# Altium PCB PCB_B Register_2021-10-06.pcbdoc
Units mm, origin at the board's own origin, x right, y up, seen from the top; angles counter-clockwise.
Board outline 124.59 x 83.95 mm, 2 copper layers (Top Layer, Bottom Layer); 29 components, 33 nets, 118 pads, 17 vias.
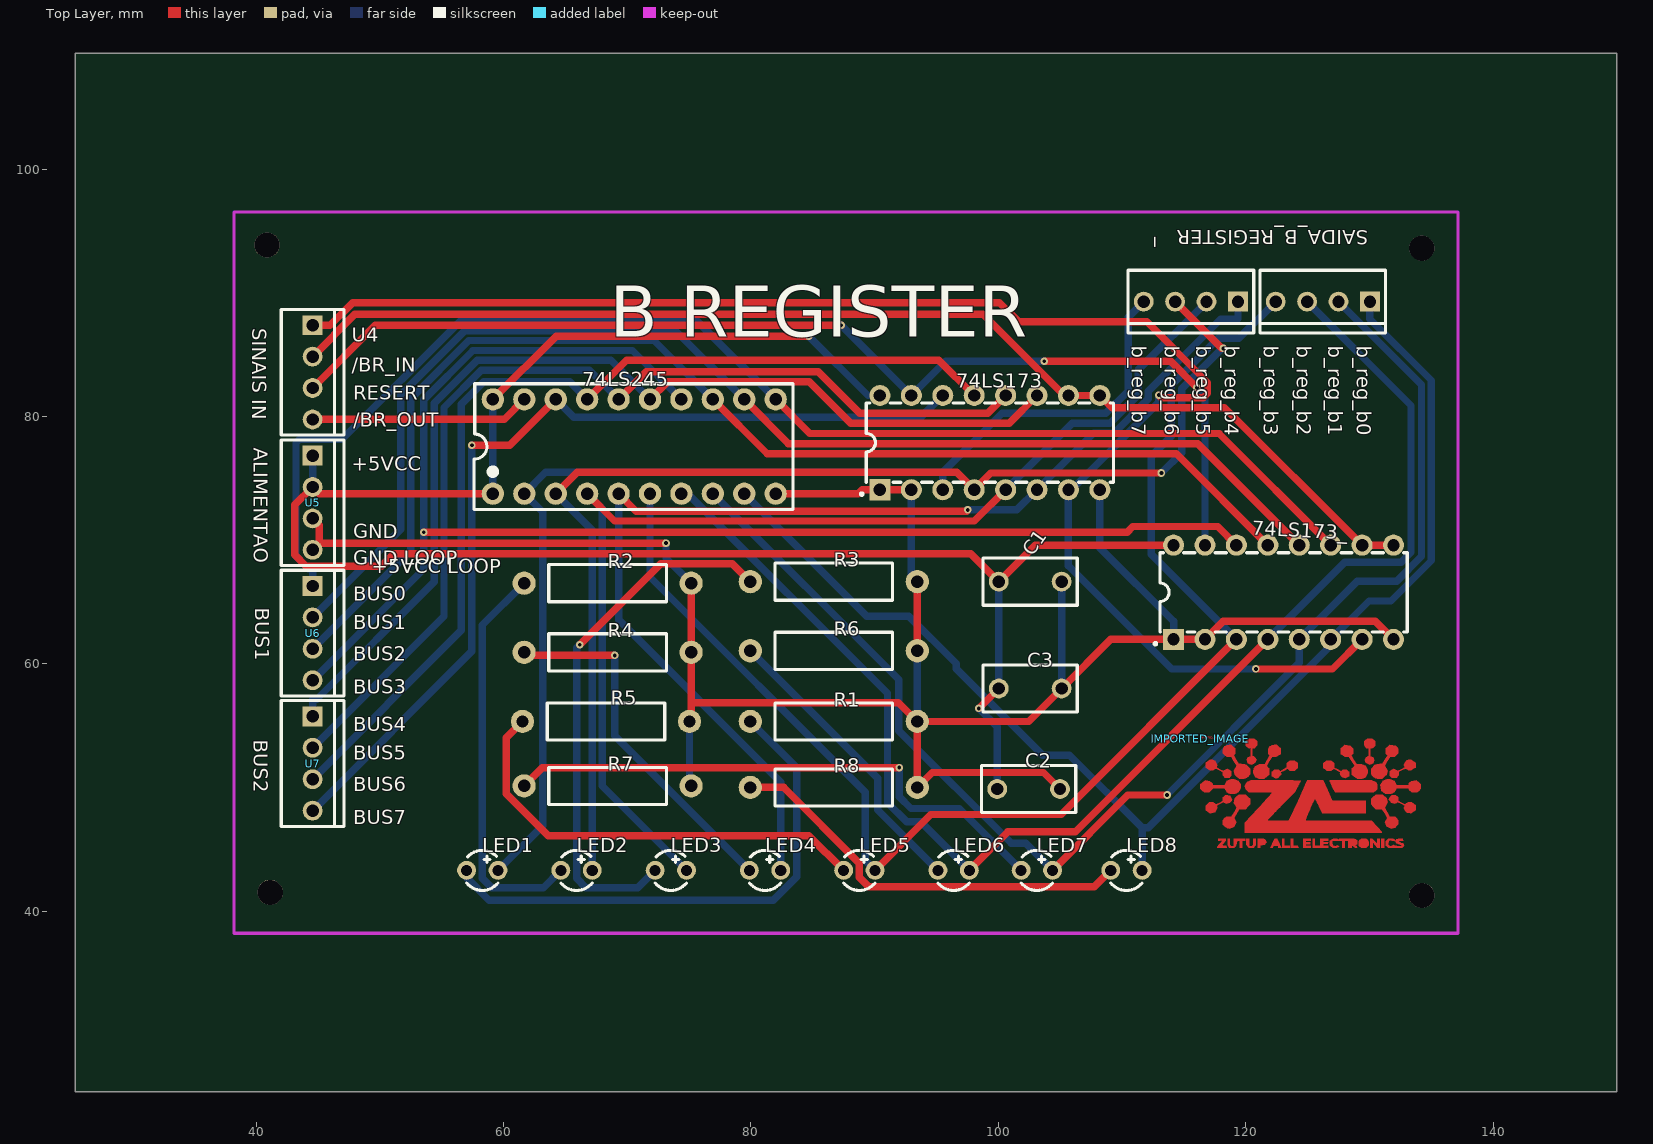
[diagram p0: Top Layer view]
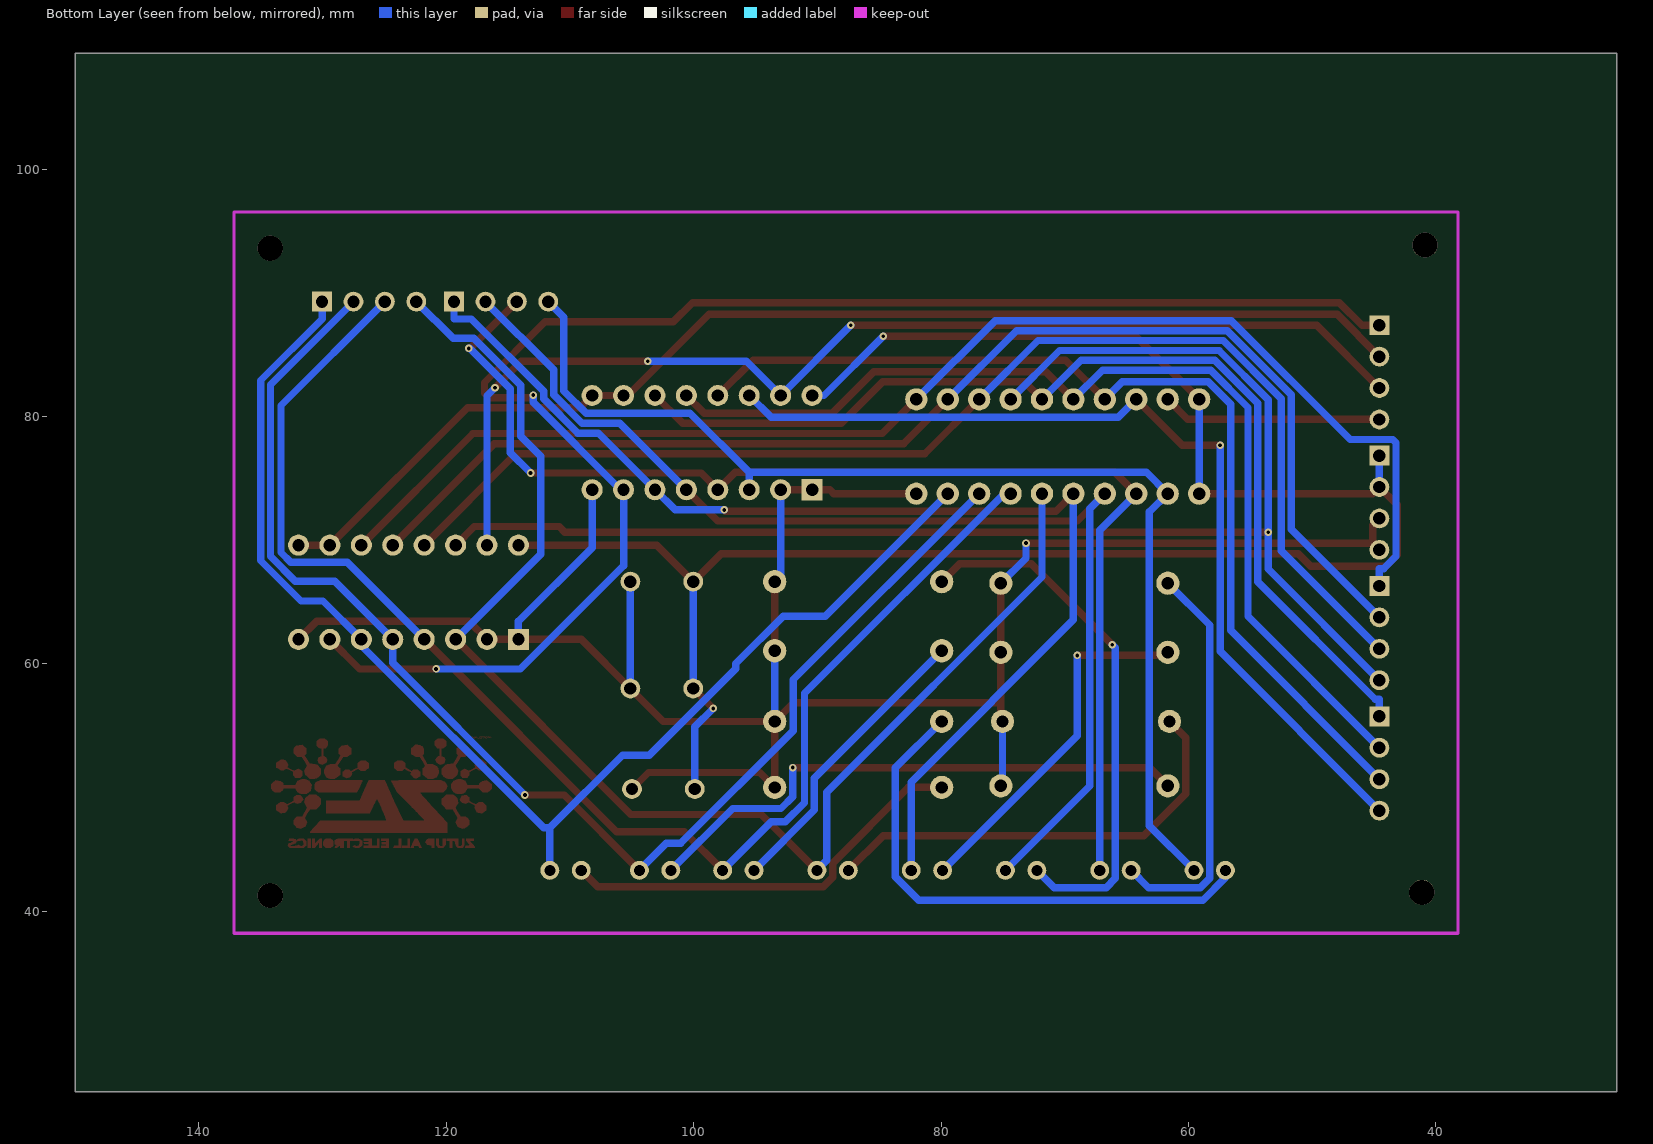
[diagram p1: Bottom Layer view, seen from below]

## Layer stack, top to bottom
Top Layer: signal copper (thickness not stored)
Dielectric: dielectric 0.32, FR-4, Dk 4.8
Bottom Layer: signal copper (thickness not stored)

## Board outline
149.987,25.4 25.4,25.4 25.4,109.347 149.987,109.347

## Components (designator, comment, footprint, x,y, rotation, side; value= is the part's Value field where it differs from the comment)
74LS173 "SN74LS173AN" PDIP-16_L19.7-W6.6-P2.54-LS7.6-BL 99.326,77.884 r0 top
74LS173_ "SN74LS173AN" PDIP-16_L19.7-W6.6-P2.54-LS7.6-BL 123.063,65.786 r0 top
74LS245 "SN74LS245N" DIP-20_L25.5-W10.0-P2.54-LS7.6-BL 70.578,77.567 r0 top
_ "ACC_OUT2" HDR-TH_4P-P2.54-D1.0 115.57,89.281 r180 top
C1 "100nF 63V poli7" CAP-TH_L7.6-W3.8-P5.08-D0.51 102.582,66.645 r0 top
C2 "100nF 63V poli" CAP-TH_L7.6-W3.8-P5.08-D0.51 102.455,49.881 r0 top
C3 "100nF 63V poli" CAP-TH_L7.6-W3.8-P5.08-D0.51 102.582,58.009 r0 top
IMPORTED_IMAGE "IMPORTED_IMAGE" IMPORTED_IMAGE 116.327,53.963 r0 top
LED1 "VERDE" LED-TH_BD3.0-P2.54-RD-GREEN 58.293,43.307 r0 top
LED2 "VERDE" LED-TH_BD3.0-P2.54-RD-GREEN 65.913,43.307 r0 top
LED3 "VERDE" LED-TH_BD3.0-P2.54-RD-GREEN 73.533,43.307 r0 top
LED4 "VERDE" LED-TH_BD3.0-P2.54-RD-GREEN 81.153,43.307 r0 top
LED5 "VERDE" LED-TH_BD3.0-P2.54-RD-GREEN 88.773,43.307 r0 top
LED6 "VERDE" LED-TH_BD3.0-P2.54-RD-GREEN 96.393,43.307 r0 top
LED7 "VERDE" LED-TH_BD3.0-P2.54-RD-GREEN 103.124,43.307 r0 top
LED8 "VERDE" LED-TH_BD3.0-P2.54-RD-GREEN 110.363,43.307 r0 top
R1 "470" RES-TH_BD3.0-L9.5-P13.50-D0.6 86.707,55.342 r0 top
R2 "470" RES-TH_BD3.0-L9.5-P13.50-D0.6 68.419,66.518 r0 top
R3 "470" RES-TH_BD3.0-L9.5-P13.50-D0.6 86.707,66.645 r0 top
R4 "470" RES-TH_BD3.0-L9.5-P13.50-D0.6 68.419,60.93 r0 top
R5 "470" RES-TH_BD3.0-L9.5-P13.50-D0.6 68.292,55.342 r0 top
R6 "470" RES-TH_BD3.0-L9.5-P13.50-D0.6 86.707,61.057 r0 top
R7 "470" RES-TH_BD3.0-L9.5-P13.50-D0.6 68.419,50.135 r0 top
R8 "470" RES-TH_BD3.0-L9.5-P13.50-D0.6 86.707,50.008 r0 top
SAIDA_B_REGISTER "ACC-OUT1" HDR-TH_4P-P2.54-D1.0 126.238,89.281 r180 top
U4 "SINAIS IN" HDR-TH_4P-P2.54-D1.0 44.577,83.566 r270 top
U5 "ALIM." HDR-TH_4P-P2.54-D1.0 44.577,73.025 r270 top
U6 "BUS1" HDR-TH_4P-P2.54-D1.0 44.577,62.484 r270 top
U7 "BUS2" HDR-TH_4P-P2.54-D1.0 44.577,51.943 r270 top

## Footprints (in the part's own frame and the unit in brackets; to place one, negate y for a bottom-side part, rotate by r counter-clockwise, add the part's x,y. Pads: shape width x height; smd on the part's side, far side on the other; paste and mask are expansions set on the pad)
CAP-TH_L7.6-W3.8-P5.08-D0.51 [mm]
  round 1.6 hole 1: 1(-2.54,0) 2(2.54,0)
  silkscreen extent -3.81,-1.91 3.81,1.91
DIP-20_L25.5-W10.0-P2.54-LS7.6-BL [mm]
  round 1.8 hole 1: 1(-11.43,-3.81) 2(-8.89,-3.81) 3(-6.35,-3.81) 4(-3.81,-3.81) 5(-1.27,-3.81) 6(1.27,-3.81) 7(3.81,-3.81) 8(6.35,-3.81) 9(8.89,-3.81) 10(11.43,-3.81) 11(11.43,3.81) 12(8.89,3.81) 13(6.35,3.81) 14(3.81,3.81) 15(1.27,3.81) 16(-1.27,3.81) 17(-3.81,3.81) 18(-6.35,3.81) 19(-8.89,3.81) 20(-11.43,3.81)
  silkscreen extent -12.95,-5.08 12.83,5.08
HDR-TH_4P-P2.54-D1.0 [mm]
  rect 1.6x1.6 hole 1: 1(-3.81,0)
  round 1.6 hole 1: 2(-1.27,0) 3(1.27,0) 4(3.81,0)
  silkscreen extent -5.08,-2.54 5.08,2.54
IMPORTED_IMAGE [mm]
  Top Layer region: 2.129,-8.759 2.155,-8.83 1.387,-8.83 1.387,-8.775 1.388,-8.772 1.388,-8.768 1.39,-8.764 1.391,-8.76 1.396,-8.75 1.402,-8.738 1.41,-8.725 1.42,-8.711 1.431,-8.695 1.443,-8.678 1.456,-8.661 1.471,-8.643 1.487,-8.624 1.503,-8.604 1.521,-8.584 1.539,-8.564 1.548,-8.554 1.557,-8.544 1.567,-8.534 1.597,-8.502 1.617,-8.482 1.635,-8.462 1.652,-8.444 1.668,-8.427 1.682,-8.411 1.695,-8.396 1.707,-8.382 1.717,-8.369 1.726,-8.357 1.734,-8.345 1.741,-8.335 1.746,-8.325 1.75,-8.316 1.753,-8.308 1.754,-8.301 1.754,-8.295 1.753,-8.289 1.751,-8.283 1.747,-8.279 1.743,-8.275 1.736,-8.271 1.729,-8.268 1.721,-8.265 1.711,-8.263 1.7,-8.261 1.688,-8.26 1.674,-8.259 1.659,-8.258 1.644,-8.257 1.626,-8.257 1.608,-8.257 1.45,-8.257 1.45,-8.085 2.081,-8.085 2.081,-8.167 2.08,-8.176 2.078,-8.187 2.074,-8.199 2.069,-8.212 2.062,-8.226 2.054,-8.241 2.045,-8.258 2.035,-8.274 2.024,-8.292 2.011,-8.31 1.998,-8.328 1.985,-8.346 1.97,-8.364 1.955,-8.383 1.94,-8.401 1.923,-8.419 1.906,-8.438 1.889,-8.456 1.873,-8.473 1.859,-8.49 1.846,-8.505 1.834,-8.519 1.823,-8.532 1.813,-8.544 1.804,-8.556 1.797,-8.567 1.791,-8.576 1.786,-8.585 1.782,-8.594 1.779,-8.602 1.778,-8.609 1.777,-8.615 1.778,-8.621 1.78,-8.627 1.784,-8.632 1.788,-8.636 1.794,-8.64 1.8,-8.644 1.808,-8.647 1.818,-8.65 1.828,-8.653 1.84,-8.656 1.852,-8.658 1.866,-8.661 1.882,-8.663 1.898,-8.665 1.916,-8.667 1.934,-8.669 2.103,-8.687
  Top Layer region: 3.406,-8.544 3.406,-8.83 3.216,-8.83 3.216,-8.257 2.981,-8.257 2.944,-8.463 2.94,-8.484 2.935,-8.506 2.93,-8.528 2.924,-8.549 2.917,-8.571 2.911,-8.592 2.904,-8.612 2.896,-8.632 2.889,-8.651 2.881,-8.669 2.873,-8.686 2.865,-8.702 2.857,-8.716 2.849,-8.729 2.841,-8.74 2.833,-8.75 2.759,-8.83 2.338,-8.83 2.273,-8.72 2.207,-8.609 2.207,-8.085 2.396,-8.085 2.396,-8.587 2.488,-8.656 2.58,-8.726 2.646,-8.689 2.712,-8.652 2.712,-8.085 3.658,-8.085 3.658,-8.257 3.406,-8.257
  Top Layer region: 11.982,-8.83 11.982,-8.085 12.432,-8.085 12.554,-8.144 12.676,-8.204 12.676,-8.537 12.607,-8.576 12.539,-8.614 12.607,-8.676 12.634,-8.704 12.656,-8.734 12.671,-8.762 12.676,-8.785 12.674,-8.798 12.669,-8.809 12.66,-8.818 12.648,-8.824 12.634,-8.828 12.618,-8.83 12.6,-8.83 12.581,-8.828 12.561,-8.824 12.54,-8.818 12.519,-8.81 12.498,-8.8 12.478,-8.789 12.458,-8.775 12.44,-8.761 12.424,-8.744 12.407,-8.727 12.389,-8.711 12.37,-8.696 12.352,-8.684 12.334,-8.673 12.318,-8.665 12.303,-8.66 12.29,-8.658 12.235,-8.658 12.235,-8.83 hole: 1285502.387,454631.691 1286606.017,454825.239 1286606.017,454825.239 1287709.647,455018.533 1287709.647,455018.533 1287709.647,456707.379 1287709.647,456707.379 1286606.017,456900.419 1286606.017,456900.419 1285502.387,457093.713 1285502.387,457093.713 1285502.387,454631.691
  Top Layer region: 13,-8.83 12.901,-8.74 12.802,-8.65 12.802,-8.295 12.907,-8.19 13.011,-8.085 13.413,-8.085 13.512,-8.185 13.527,-8.201 13.54,-8.217 13.553,-8.234 13.565,-8.25 13.576,-8.268 13.586,-8.285 13.595,-8.303 13.603,-8.321 13.611,-8.34 13.617,-8.358 13.623,-8.377 13.627,-8.396 13.631,-8.415 13.633,-8.434 13.635,-8.453 13.636,-8.471 13.636,-8.49 13.635,-8.509 13.633,-8.528 13.63,-8.546 13.626,-8.564 13.622,-8.582 13.616,-8.6 13.609,-8.617 13.602,-8.634 13.593,-8.651 13.584,-8.667 13.574,-8.683 13.562,-8.698 13.55,-8.713 13.537,-8.727 13.523,-8.74 13.424,-8.83 hole: 1295136.099,452466.849 1296348.187,453056.383 1296348.187,453056.383 1297560.275,453646.425 1297560.275,453646.425 1297364.695,455184.395 1297364.695,455184.395 1297169.369,456722.873 1297169.369,456722.873 1295457.155,456902.197 1295457.155,456902.197 1293744.941,457082.029 1293744.941,457082.029 1293314.411,455522.977 1293314.411,455522.977 1292884.389,453964.179 1292884.389,453964.179 1294010.117,453215.387 1294010.117,453215.387 1295136.099,452466.849
  Top Layer region: 5.662,-8.83 5.699,-8.75 5.742,-8.656 5.811,-8.509 5.868,-8.386 6.008,-8.085 6.22,-8.085 6.374,-8.413 6.488,-8.658 6.541,-8.77 6.569,-8.83 6.306,-8.83 6.306,-8.658 5.942,-8.658 5.905,-8.744 5.869,-8.83 hole: 1224960.217,454142.487 1224960.217,455862.575 1224960.217,455862.575 1223698.853,455862.575 1223698.853,455862.575 1223698.853,454142.487 1223698.853,454142.487 1224960.217,454142.487
  Top Layer region: 9.712,-8.83 9.712,-8.085 10.343,-8.085 10.343,-8.257 9.964,-8.257 9.964,-8.372 10.353,-8.372 10.301,-8.515 9.964,-8.551 9.964,-8.658 10.343,-8.658 10.343,-8.83
  Top Layer region: 14.631,-8.83 14.631,-8.085 14.883,-8.085 14.883,-8.83
  Top Layer region: 4.412,-8.72 4.347,-8.83 3.917,-8.83 3.721,-8.576 3.721,-8.085 3.973,-8.085 3.973,-8.652 4.039,-8.689 4.105,-8.726 4.197,-8.656 4.288,-8.587 4.288,-8.085 4.478,-8.085 4.478,-8.609
  Top Layer region: 7.316,-8.83 7.316,-8.085 7.505,-8.085 7.505,-8.651 7.905,-8.687 7.957,-8.83
  Top Layer region: 11.478,-8.83 11.478,-8.269 10.73,-8.269 10.692,-8.357 10.655,-8.445 10.726,-8.648 10.826,-8.683 10.926,-8.718 10.999,-8.663 11.072,-8.608 11.165,-8.662 11.257,-8.716 11.162,-8.772 11.152,-8.778 11.14,-8.784 11.126,-8.789 11.111,-8.794 11.095,-8.799 11.078,-8.804 11.06,-8.808 11.041,-8.812 11.022,-8.816 11.003,-8.819 10.983,-8.822 10.963,-8.825 10.943,-8.827 10.923,-8.828 10.903,-8.829 10.884,-8.83 10.699,-8.83 10.584,-8.736 10.469,-8.641 10.469,-8.264 10.609,-8.174 10.749,-8.085 11.074,-8.085 11.15,-8.154 11.226,-8.223 11.226,-8.085 11.919,-8.085 11.919,-8.257 11.667,-8.257 11.667,-8.83
  Top Layer region: 9.081,-8.83 9.081,-8.085 9.27,-8.085 9.27,-8.658 9.649,-8.658 9.649,-8.83
  Top Layer region: 14.505,-8.458 14.505,-8.83 14.325,-8.83 14.131,-8.617 13.937,-8.403 13.937,-8.83 13.748,-8.83 13.748,-8.085 13.906,-8.085 14.108,-8.3 14.311,-8.515 14.313,-8.3 14.316,-8.085 14.505,-8.085
  Top Layer region: 4.856,-8.749 4.856,-8.83 4.667,-8.83 4.667,-8.085 4.851,-8.085 4.874,-8.085 4.896,-8.086 4.918,-8.086 4.938,-8.087 4.959,-8.089 4.978,-8.09 4.997,-8.093 5.015,-8.095 5.033,-8.098 5.05,-8.101 5.067,-8.104 5.083,-8.108 5.098,-8.112 5.113,-8.116 5.127,-8.121 5.141,-8.126 5.154,-8.132 5.167,-8.138 5.179,-8.144 5.191,-8.151 5.202,-8.158 5.213,-8.165 5.224,-8.173 5.234,-8.182 5.244,-8.19 5.253,-8.199 5.262,-8.209 5.27,-8.219 5.279,-8.23 5.287,-8.241 5.294,-8.252 5.301,-8.264 5.365,-8.372 5.3,-8.482 5.235,-8.592 4.856,-8.668 hole: 1211716.657,454631.691 1213909.185,455015.739 1213909.185,455015.739 1214120.513,456012.689 1214120.513,456012.689 1214331.587,457009.639 1214331.587,457009.639 1211716.657,457009.639 1211716.657,457009.639 1211716.657,454631.691
  Top Layer region: 7.252,-8.744 7.252,-8.83 6.622,-8.83 6.622,-8.085 6.811,-8.085 6.811,-8.658 7.252,-8.658
  Top Layer region: 8.955,-8.744 8.955,-8.83 8.325,-8.83 8.325,-8.085 8.955,-8.085 8.955,-8.257 8.514,-8.257 8.514,-8.372 8.892,-8.372 8.892,-8.544 8.514,-8.544 8.514,-8.658 8.955,-8.658
  Top Layer region: 16.4,-8.741 16.327,-8.821 15.76,-8.82 15.194,-8.818 15.102,-8.734 15.009,-8.65 15.009,-8.295 15.114,-8.19 15.218,-8.085 15.625,-8.085 15.695,-8.162 15.765,-8.239 15.688,-8.309 15.5,-8.275 15.312,-8.24 15.256,-8.32 15.245,-8.338 15.235,-8.359 15.225,-8.382 15.217,-8.406 15.21,-8.43 15.204,-8.454 15.201,-8.477 15.2,-8.499 15.199,-8.597 15.329,-8.66 15.459,-8.724 15.62,-8.602 15.664,-8.642 15.67,-8.646 15.678,-8.65 15.688,-8.654 15.7,-8.658 15.715,-8.662 15.731,-8.666 15.749,-8.67 15.768,-8.673 15.789,-8.677 15.81,-8.68 15.833,-8.683 15.857,-8.686 15.881,-8.688 15.906,-8.69 15.932,-8.692 15.957,-8.693 16.208,-8.705 16.24,-8.658 16.272,-8.61 16.056,-8.546 15.84,-8.481 15.77,-8.314 15.807,-8.228 15.843,-8.141 15.989,-8.108 16.02,-8.102 16.054,-8.097 16.089,-8.093 16.124,-8.09 16.158,-8.089 16.19,-8.089 16.22,-8.091 16.245,-8.094 16.355,-8.114 16.407,-8.257 16.018,-8.257 16.018,-8.302 16.019,-8.307 16.022,-8.312 16.027,-8.318 16.033,-8.324 16.041,-8.331 16.051,-8.338 16.062,-8.345 16.074,-8.353 16.087,-8.36 16.102,-8.368 16.118,-8.375 16.134,-8.383 16.151,-8.39 16.169,-8.398 16.188,-8.405 16.207,-8.411 16.397,-8.476 16.435,-8.568 16.474,-8.66
  Top Layer region: 197 vertices and 0 holes, not listed, extent 3.588,-7.626 14.694,-3.383
  Top Layer region: 2.39,-7.288 2.251,-7.25 2.237,-7.245 2.221,-7.24 2.204,-7.233 2.186,-7.226 2.168,-7.217 2.15,-7.208 2.131,-7.199 2.112,-7.188 2.093,-7.177 2.074,-7.166 2.055,-7.154 2.037,-7.143 2.019,-7.13 2.002,-7.118 1.986,-7.106 1.971,-7.094 1.829,-6.976 1.829,-6.61 1.96,-6.459 2.09,-6.308 2.515,-6.308 2.733,-5.956 2.951,-5.605 2.824,-5.411 2.698,-5.216 2.738,-5.023 2.778,-4.829 2.943,-4.68 3.107,-4.53 3.667,-4.53 3.852,-4.698 4.036,-4.865 4.036,-5.331 3.855,-5.515 3.675,-5.699 3.409,-5.705 3.143,-5.711 2.736,-6.405 2.828,-6.582 2.92,-6.758 2.757,-7.116 2.574,-7.202
  Top Layer region: 15.45,-7.285 15.27,-7.2 15.09,-7.116 15.009,-6.937 14.927,-6.758 15.021,-6.58 15.114,-6.401 14.9,-6.052 14.687,-5.703 14.177,-5.703 13.994,-5.517 13.811,-5.331 13.811,-4.865 13.996,-4.698 14.18,-4.53 14.74,-4.53 15.064,-4.825 15.105,-4.995 15.147,-5.165 15.024,-5.389 14.902,-5.614 15.117,-5.961 15.332,-6.308 15.757,-6.308 15.888,-6.459 16.018,-6.61 16.018,-6.923 15.893,-7.067 15.768,-7.212
  Top Layer region: 0.774,-6.021 0.608,-5.902 0.441,-5.783 0.441,-5.426 0.579,-5.293 0.716,-5.161 1.044,-5.161 1.302,-5.325 1.566,-5.182 1.829,-5.039 1.829,-4.767 1.931,-4.674 2.034,-4.581 2.23,-4.598 2.427,-4.616 2.511,-4.777 2.596,-4.937 2.498,-5.073 2.4,-5.209 2.274,-5.245 2.149,-5.282 2.014,-5.216 1.88,-5.151 1.603,-5.284 1.326,-5.418 1.36,-5.516 1.394,-5.614 1.298,-5.782 1.203,-5.95 1.101,-5.985 1.078,-5.992 1.052,-5.999 1.025,-6.005 0.996,-6.01 0.967,-6.015 0.938,-6.018 0.911,-6.02 0.886,-6.021
  Top Layer region: 17.24,-5.902 17.074,-6.021 16.961,-6.021 16.936,-6.02 16.909,-6.018 16.881,-6.015 16.852,-6.01 16.823,-6.005 16.795,-5.999 16.769,-5.992 16.746,-5.985 16.644,-5.95 16.549,-5.782 16.453,-5.614 16.488,-5.516 16.522,-5.418 16.245,-5.284 15.968,-5.151 15.833,-5.216 15.698,-5.282 15.573,-5.245 15.447,-5.209 15.353,-5.078 15.259,-4.947 15.302,-4.839 15.311,-4.816 15.323,-4.791 15.336,-4.766 15.35,-4.741 15.364,-4.718 15.378,-4.695 15.392,-4.676 15.405,-4.659 15.466,-4.587 15.82,-4.587 15.919,-4.677 16.018,-4.767 16.018,-5.039 16.282,-5.182 16.545,-5.325 16.674,-5.243 16.803,-5.161 17.114,-5.161 17.406,-5.41 17.406,-5.783
  Top Layer region: 2.968,-4.414 2.846,-4.473 2.388,-4.473 2.267,-4.414 2.145,-4.354 2.049,-4.184 1.952,-4.014 1.064,-4.014 0.905,-4.186 0.746,-4.358 0.31,-4.358 0.155,-4.217 0,-4.076 0,-3.68 0.401,-3.373 0.591,-3.407 0.78,-3.442 0.895,-3.536 0.918,-3.557 0.939,-3.579 0.958,-3.602 0.975,-3.625 0.989,-3.648 1,-3.67 1.007,-3.69 1.009,-3.707 1.009,-3.784 1.952,-3.784 2.052,-3.608 2.152,-3.432 2.353,-3.352 2.398,-3.335 2.418,-3.327 2.437,-3.319 2.456,-3.313 2.473,-3.307 2.489,-3.301 2.504,-3.296 2.519,-3.292 2.533,-3.288 2.546,-3.284 2.559,-3.282 2.572,-3.28 2.584,-3.278 2.596,-3.277 2.608,-3.277 2.62,-3.277 2.632,-3.278 2.645,-3.279 2.657,-3.281 2.67,-3.283 2.684,-3.287 2.698,-3.29 2.712,-3.294 2.728,-3.299 2.744,-3.304 2.761,-3.31 2.779,-3.317 2.798,-3.324 2.819,-3.331 2.863,-3.348 3.074,-3.428 3.177,-3.562 3.279,-3.695 3.279,-4.02 3.184,-4.187 3.089,-4.354
  Top Layer region: 14.953,-4.473 14.788,-4.343 14.623,-4.214 14.587,-3.972 14.552,-3.73 14.659,-3.58 14.767,-3.431 14.967,-3.352 15.011,-3.334 15.032,-3.327 15.051,-3.319 15.069,-3.313 15.086,-3.306 15.102,-3.301 15.117,-3.296 15.132,-3.291 15.146,-3.288 15.159,-3.284 15.172,-3.282 15.185,-3.28 15.197,-3.278 15.21,-3.277 15.222,-3.277 15.234,-3.277 15.246,-3.278 15.259,-3.279 15.271,-3.281 15.284,-3.284 15.298,-3.287 15.312,-3.291 15.327,-3.295 15.342,-3.3 15.359,-3.305 15.376,-3.311 15.395,-3.318 15.414,-3.325 15.435,-3.333 15.48,-3.35 15.695,-3.431 15.896,-3.784 16.838,-3.784 16.838,-3.707 16.839,-3.699 16.841,-3.69 16.843,-3.68 16.847,-3.67 16.852,-3.659 16.858,-3.648 16.864,-3.637 16.872,-3.625 16.88,-3.614 16.889,-3.602 16.898,-3.59 16.908,-3.579 16.919,-3.567 16.93,-3.557 16.941,-3.546 16.953,-3.536 17.067,-3.442 17.257,-3.407 17.446,-3.373 17.647,-3.526 17.847,-3.68 17.847,-4.076 17.692,-4.217 17.538,-4.358 17.114,-4.358 16.976,-4.241 16.949,-4.216 16.923,-4.191 16.899,-4.166 16.879,-4.142 16.862,-4.12 16.849,-4.1 16.841,-4.082 16.838,-4.069 16.838,-4.014 15.896,-4.014 15.799,-4.184 15.702,-4.354 15.58,-4.414 15.459,-4.473
  Top Layer region: 10.914,-4.358 10.691,-3.92 10.647,-3.831 10.605,-3.746 10.567,-3.667 10.534,-3.596 10.507,-3.535 10.486,-3.486 10.473,-3.451 10.469,-3.432 10.469,-3.383 13.88,-3.383 14.059,-3.467 14.237,-3.551 14.277,-3.644 14.28,-3.654 14.284,-3.666 14.288,-3.679 14.292,-3.694 14.295,-3.709 14.298,-3.726 14.301,-3.743 14.304,-3.762 14.307,-3.78 14.309,-3.799 14.311,-3.819 14.313,-3.838 14.314,-3.858 14.315,-3.877 14.315,-3.896 14.316,-3.914 14.316,-4.092 14.179,-4.225 14.041,-4.358
  Top Layer region: 3.144,-3.268 2.962,-3.104 2.781,-2.939 2.736,-2.776 2.692,-2.614 2.82,-2.401 2.948,-2.189 2.721,-1.84 2.495,-1.491 2.138,-1.491 1.984,-1.35 1.829,-1.209 1.829,-1.031 1.829,-1.012 1.83,-0.993 1.832,-0.973 1.834,-0.953 1.837,-0.932 1.84,-0.912 1.844,-0.891 1.849,-0.871 1.853,-0.852 1.859,-0.833 1.864,-0.814 1.87,-0.797 1.876,-0.78 1.883,-0.765 1.889,-0.751 1.896,-0.738 1.963,-0.624 2.101,-0.574 2.116,-0.569 2.132,-0.564 2.148,-0.559 2.166,-0.554 2.184,-0.549 2.203,-0.545 2.222,-0.541 2.241,-0.537 2.26,-0.534 2.279,-0.53 2.298,-0.528 2.316,-0.525 2.334,-0.523 2.352,-0.521 2.368,-0.52 2.384,-0.52 2.528,-0.516 2.683,-0.657 2.838,-0.798 2.838,-1.239 2.766,-1.304 2.693,-1.37 2.91,-1.703 3.127,-2.036 3.282,-2.052 3.299,-2.053 3.316,-2.055 3.335,-2.058 3.354,-2.06 3.374,-2.063 3.394,-2.066 3.414,-2.069 3.435,-2.072 3.455,-2.075 3.476,-2.078 3.495,-2.081 3.515,-2.084 3.534,-2.088 3.552,-2.091 3.568,-2.094 3.584,-2.097 3.732,-2.126 3.884,-2.276 4.036,-2.425 4.035,-2.66 4.033,-2.896 3.924,-3.018 3.913,-3.031 3.9,-3.044 3.886,-3.057 3.871,-3.071 3.856,-3.084 3.84,-3.097 3.824,-3.11 3.807,-3.123 3.79,-3.136 3.773,-3.148 3.756,-3.159 3.74,-3.17 3.723,-3.18 3.708,-3.189 3.692,-3.197 3.678,-3.204 3.54,-3.268
  Top Layer region: 5.375,-3.101 5.169,-3.268 4.984,-3.268 4.964,-3.268 4.943,-3.267 4.922,-3.265 4.899,-3.263 4.876,-3.26 4.852,-3.257 4.829,-3.253 4.805,-3.248 4.781,-3.243 4.758,-3.238 4.735,-3.232 4.712,-3.227 4.691,-3.22 4.67,-3.214 4.651,-3.207 4.633,-3.2 4.468,-3.131 4.378,-2.973 4.368,-2.955 4.359,-2.937 4.35,-2.919 4.342,-2.901 4.335,-2.882 4.328,-2.864 4.321,-2.846 4.316,-2.827 4.311,-2.809 4.306,-2.79 4.302,-2.772 4.299,-2.753 4.296,-2.734 4.295,-2.716 4.293,-2.697 4.292,-2.678 4.292,-2.66 4.293,-2.641 4.294,-2.622 4.295,-2.603 4.298,-2.585 4.301,-2.566 4.304,-2.547 4.308,-2.528 4.313,-2.509 4.319,-2.491 4.325,-2.472 4.331,-2.453 4.338,-2.434 4.346,-2.416 4.355,-2.397 4.364,-2.378 4.439,-2.228 4.613,-2.146 4.787,-2.064 4.995,-2.064 5.203,-2.063 5.414,-1.714 5.625,-1.364 5.556,-1.301 5.487,-1.239 5.487,-0.853 5.554,-0.738 5.621,-0.624 5.759,-0.574 5.774,-0.569 5.789,-0.564 5.806,-0.559 5.824,-0.554 5.842,-0.549 5.86,-0.545 5.879,-0.541 5.899,-0.537 5.918,-0.534 5.937,-0.53 5.956,-0.528 5.974,-0.525 5.992,-0.523 6.009,-0.521 6.026,-0.52 6.041,-0.52 6.186,-0.516 6.341,-0.657 6.496,-0.798 6.496,-1.253 6.33,-1.372 6.163,-1.491 5.829,-1.491 5.598,-1.848 5.366,-2.205 5.474,-2.312 5.581,-2.42 5.581,-2.934
  Top Layer region: 14.307,-3.268 14.17,-3.204 14.155,-3.197 14.14,-3.189 14.124,-3.18 14.108,-3.17 14.091,-3.159 14.074,-3.148 14.057,-3.136 14.04,-3.123 14.024,-3.11 14.007,-3.097 13.991,-3.084 13.976,-3.071 13.961,-3.057 13.948,-3.044 13.935,-3.031 13.923,-3.018 13.814,-2.896 13.811,-2.425 14.116,-2.126 14.263,-2.097 14.279,-2.094 14.296,-2.091 14.314,-2.088 14.332,-2.084 14.352,-2.081 14.372,-2.078 14.392,-2.075 14.413,-2.072 14.433,-2.069 14.453,-2.066 14.474,-2.063 14.493,-2.06 14.513,-2.058 14.531,-2.055 14.549,-2.053 14.565,-2.052 14.72,-2.036 14.937,-1.703 15.154,-1.37 15.082,-1.304 15.009,-1.239 15.009,-0.798 15.172,-0.65 15.334,-0.502 15.798,-0.57 15.908,-0.693 16.018,-0.815 16.018,-1.209 15.864,-1.35 15.709,-1.491 15.352,-1.491 15.126,-1.84 14.9,-2.189 15.028,-2.401 15.156,-2.614 15.111,-2.776 15.066,-2.939 14.885,-3.104 14.704,-3.268
  Top Layer region: 12.678,-3.268 12.472,-3.101 12.266,-2.934 12.266,-2.42 12.373,-2.312 12.481,-2.205 12.249,-1.848 12.018,-1.491 11.684,-1.491 11.518,-1.372 11.352,-1.253 11.352,-0.798 11.514,-0.65 11.676,-0.502 12.14,-0.57 12.25,-0.693 12.361,-0.815 12.361,-1.239 12.22,-1.366 12.431,-1.715 12.642,-2.064 13.048,-2.064 13.379,-2.201 13.559,-2.517 13.559,-2.815 13.469,-2.973 13.379,-3.131 13.214,-3.2 13.196,-3.207 13.177,-3.214 13.156,-3.22 13.135,-3.227 13.113,-3.232 13.09,-3.238 13.066,-3.243 13.043,-3.248 13.019,-3.253 12.995,-3.257 12.971,-3.26 12.948,-3.263 12.926,-3.265 12.904,-3.267 12.883,-3.268 12.863,-3.268
  Top Layer region: 11.891,-3.128 11.736,-3.221 11.605,-3.183 11.474,-3.145 11.375,-3.006 11.275,-2.868 11.307,-2.792 11.338,-2.717 10.786,-2.45 10.695,-2.519 10.604,-2.588 10.41,-2.593 10.216,-2.598 10.09,-2.494 9.964,-2.391 9.964,-1.987 10.173,-1.778 10.595,-1.778 10.721,-1.892 10.847,-2.007 10.847,-2.344 11.114,-2.489 11.381,-2.634 11.503,-2.523 11.847,-2.523 11.946,-2.613 12.045,-2.703 12.045,-3.036
  Top Layer region: 6.165,-3.204 6.152,-3.205 6.139,-3.204 6.126,-3.203 6.112,-3.2 6.099,-3.197 6.085,-3.193 6.07,-3.189 6.056,-3.183 6.041,-3.177 6.026,-3.17 6.01,-3.162 5.994,-3.153 5.977,-3.143 5.96,-3.133 5.942,-3.122 5.802,-3.033 5.802,-2.703 5.901,-2.613 6,-2.523 6.344,-2.523 6.404,-2.576 6.464,-2.629 6.732,-2.484 7,-2.339 7,-2.007 7.126,-1.892 7.252,-1.778 7.652,-1.778 7.883,-1.967 7.883,-2.391 7.757,-2.494 7.631,-2.598 7.437,-2.593 7.244,-2.588 7.153,-2.519 7.062,-2.45 6.779,-2.587 6.497,-2.723 6.532,-2.823 6.567,-2.922 6.408,-3.067 6.391,-3.082 6.374,-3.096 6.358,-3.11 6.343,-3.122 6.328,-3.134 6.313,-3.145 6.299,-3.154 6.284,-3.163 6.271,-3.171 6.257,-3.179 6.244,-3.185 6.23,-3.19 6.217,-3.195 6.204,-3.198 6.191,-3.201 6.178,-3.203
  Top Layer region: 1.97,-3.154 1.892,-3.068 1.813,-2.981 1.813,-2.714 1.548,-2.569 1.284,-2.423 1.166,-2.502 1.048,-2.58 0.774,-2.58 0.441,-2.343 0.441,-1.958 0.608,-1.839 0.774,-1.72 0.886,-1.72 0.911,-1.721 0.938,-1.723 0.967,-1.726 0.996,-1.731 1.025,-1.736 1.052,-1.742 1.078,-1.749 1.101,-1.756 1.203,-1.791 1.298,-1.959 1.394,-2.127 1.325,-2.324 1.593,-2.47 1.86,-2.615 2.027,-2.53 2.193,-2.444 2.358,-2.542 2.523,-2.64 2.523,-3.016 2.447,-3.085 2.371,-3.154
  Top Layer region: 15.956,-3.068 15.877,-3.154 15.476,-3.154 15.4,-3.085 15.325,-3.016 15.325,-2.64 15.49,-2.542 15.655,-2.444 15.821,-2.53 15.987,-2.615 16.254,-2.47 16.522,-2.324 16.453,-2.127 16.55,-1.958 16.571,-1.923 16.594,-1.889 16.618,-1.858 16.642,-1.829 16.665,-1.804 16.688,-1.783 16.708,-1.768 16.727,-1.759 16.735,-1.756 16.745,-1.753 16.756,-1.75 16.768,-1.747 16.781,-1.744 16.794,-1.741 16.808,-1.739 16.822,-1.737 16.837,-1.734 16.852,-1.732 16.867,-1.73 16.882,-1.729 16.897,-1.727 16.912,-1.726 16.926,-1.725 16.94,-1.725 17.074,-1.72 17.24,-1.839 17.406,-1.958 17.406,-2.343 17.24,-2.461 17.074,-2.58 16.799,-2.58 16.683,-2.503 16.567,-2.426 16.301,-2.561 16.034,-2.697 16.034,-2.981
  Top Layer region: 4.179,-2.125 4.015,-2.068 3.85,-2.011 3.811,-1.87 3.772,-1.728 3.853,-1.497 3.976,-1.461 4.099,-1.426 4.099,-0.803 4.014,-0.803 4.005,-0.802 3.995,-0.8 3.984,-0.798 3.972,-0.794 3.96,-0.789 3.947,-0.783 3.934,-0.776 3.921,-0.769 3.907,-0.761 3.893,-0.752 3.88,-0.742 3.866,-0.732 3.853,-0.722 3.839,-0.711 3.827,-0.699 3.815,-0.687 3.7,-0.572 3.7,-0.231 3.815,-0.115 3.93,0 4.351,0 4.478,-0.115 4.604,-0.229 4.604,-0.548 4.506,-0.675 4.407,-0.803 4.225,-0.803 4.225,-1.434 4.287,-1.434 4.294,-1.434 4.301,-1.436 4.31,-1.44 4.319,-1.445 4.329,-1.451 4.339,-1.458 4.349,-1.466 4.36,-1.475 4.371,-1.485 4.383,-1.496 4.394,-1.507 4.406,-1.519 4.417,-1.532 4.428,-1.546 4.439,-1.56 4.45,-1.574 4.551,-1.715 4.468,-1.953 4.324,-2.039
  Top Layer region: 13.668,-2.125 13.524,-2.039 13.379,-1.953 13.338,-1.834 13.296,-1.715 13.397,-1.574 13.419,-1.546 13.442,-1.519 13.465,-1.496 13.487,-1.475 13.509,-1.458 13.528,-1.445 13.546,-1.436 13.56,-1.434 13.622,-1.434 13.622,-0.803 13.44,-0.803 13.342,-0.675 13.244,-0.548 13.244,-0.229 13.37,-0.115 13.496,0 13.918,0 14.033,-0.115 14.147,-0.231 14.147,-0.572 14.033,-0.687 14.008,-0.711 13.981,-0.732 13.954,-0.752 13.927,-0.769 13.9,-0.783 13.875,-0.794 13.852,-0.8 13.833,-0.803 13.748,-0.803 13.748,-1.426 14,-1.498 14.037,-1.634 14.075,-1.769 14.032,-1.891 13.99,-2.014 13.829,-2.069
LED-TH_BD3.0-P2.54-RD-GREEN [mil]
  round 60 hole 35.43: 1(-50,0) 2(50,0)
  silkscreen extent -50,-64 50,64
PDIP-16_L19.7-W6.6-P2.54-LS7.6-BL [mm]
  rect 1.7x1.7 hole 1: 1(-8.89,-3.81)
  round 1.7 hole 1: 2(-6.35,-3.81) 3(-3.81,-3.81) 4(-1.27,-3.81) 5(1.27,-3.81) 6(3.81,-3.81) 7(6.35,-3.81) 8(8.89,-3.81) 9(8.89,3.81) 10(6.35,3.81) 11(3.81,3.81) 12(1.27,3.81) 13(-1.27,3.81) 14(-3.81,3.81) 15(-6.35,3.81) 16(-8.89,3.81)
  silkscreen extent -10.46,-4.26 10,3.2
RES-TH_BD3.0-L9.5-P13.50-D0.6 [mm]
  round 1.88 hole 1: 1(-6.75,0) 2(6.75,0)
  silkscreen extent -4.75,-1.5 4.75,1.5

## Free pads (board coordinates)
  round 2.032 hole 2.032 unplated: ""(40.894,93.853) ""(41.148,41.529) ""(134.239,41.275) ""(134.239,93.599)

## Via types
v1: diameter 0.61, hole 0.305, Top Layer to Bottom Layer, 17 vias

## Nets (pads, with @x,y where several pads share a name; then routed paths per layer and width w, separated by ;. In a path a pad name is that pad's centre, name@x,y a point inside that pad or via, vN(x,y) a via of type N, cw(c..) or ccw(c..) an arc to the next point about the centre after c; other vN are vias at no path point)
+5V: 74LS173.16 74LS173_.16 74LS245.1 74LS245.20 C1.1 C2.1 C3.1 U5.1 U5.2 | length 158.5
  Top Layer w0.6: 74LS245.1 45.115,73.757 U5.2 43.143,72.861 43.143,68.804 44.044,67.903 50.131,67.903 51.133,68.906 97.782,68.906 C1.1 102.993,69.596 74LS173_.16 ; 74LS245.20 64.255,86.484 v1(84.681,86.484) ; v1(98.426,56.393) C3.1
  Bottom Layer w0.6: U5.2 U5.1 ; 74LS245.1 74LS245.20 ; v1(84.681,86.484) 89.47,81.694 74LS173.16 ; v1(98.426,56.393) 99.915,54.903 C2.1 ; C3.1 C1.1
GND: 74LS173.1 74LS173.2 74LS173.8 74LS173_.1 74LS173_.2 74LS173_.8 74LS245.10 C1.2 C2.2 C3.2 R1.2 R2.2 R3.2 R4.2 R5.2 R6.2 R7.2 R8.2 U5.3 U5.4 | length 184.1
  Top Layer w0.6: U5.4 U5.4@45.122,69.76 ; U5.3 45.122,71.21 U5.4@45.122,69.76 ; v1(73.141,69.76) U5.4@45.122,69.76 ; R5.2 75.169,55.469 75.169,56.864 ; R2.2 R4.2 75.169,56.864 ; 74LS245.10 88.668,73.757 88.985,74.074 74LS173.1 74LS173.2 ; R6.2 R3.2 ; C2.2 103.661,51.216 94.665,51.216 R8.2 R1.2 ; 74LS173_.8 130.478,63.451 118.188,63.451 74LS173_.2 115.625,61.976 114.899,61.976 74LS173_.1 109.089,61.976 C3.2 102.455,55.342 R1.2 ; 75.169,56.864 91.936,56.864 R1.2
  Bottom Layer w0.6: v1(73.141,69.76) 73.141,68.546 R2.2 ; R5.2 75.042,50.262 R7.2 ; 74LS173.2 92.976,67.126 R3.2 ; R1.2 R6.2 ; C3.2 C1.2 ; 74LS173.8 108.216,69.384 114.173,63.427 74LS173_.1
LED1_2: 74LS173.3 74LS245.2 _.4 LED1.2 | length 93.9
  Bottom Layer w0.6: LED1.2 63.167,46.911 63.167,72.278 74LS245.2 63.404,75.473 95.516,75.473 ; 74LS173.3 95.516,75.473 ; _.4 110.495,88.016 110.495,82.055 108.703,80.263 100.306,80.263 95.516,75.473
LED2_2: 74LS173.4 74LS245.3 _.3 LED2.2 | length 100.2
  Top Layer w0.6: 74LS245.3 65.955,75.484 96.646,75.484 74LS173.4 99.408,75.427 v1(113.192,75.427) ; _.3 118.081,85.5 v1(118.194,85.5)
  Bottom Layer w0.6: 74LS245.3 67.183,70.802 LED2.2 ; v1(113.192,75.427) 114.837,77.071 114.837,82.237 118.1,85.5 v1(118.194,85.5)
LED3_2: 74LS173.5 74LS245.4 _.2 LED3.2 | length 93.3
  Top Layer w0.6: 74LS245.4 68.978,71.548 98.07,71.548 74LS173.5
  Bottom Layer w0.6: 74LS245.4 67.986,72.539 67.986,50.124 LED3.2 ; 74LS173.5 105.982,79.46 109.035,79.46 111.333,81.758 111.333,83.774 _.2
LED4_2: 74LS173.6 74LS245.5 _.1 LED4.2 | length 94.7
  Top Layer w0.6: 74LS245.5 70.715,72.351 97.444,72.351 v1(97.537,72.444)
  Bottom Layer w0.6: 74LS245.5 69.308,63.549 82.423,50.434 LED4.2 ; v1(97.537,72.444) 101.506,72.444 74LS173.6 107.719,78.657 109.367,78.657 112.136,81.425 112.136,82.037 117.978,87.879 119.38,87.879 _.1
LED5_1: LED5.1 R5.1 | length 36.2
  Top Layer w0.6: R5.1 60.219,54.019 60.219,49.509 63.609,46.119 84.691,46.119 LED5.1
LED5_2: 74LS173_.3 74LS245.6 LED5.2 SAIDA_B_REGISTER.4 | length 110.2
  Top Layer w0.6: LED5.2 94.556,47.82 105.097,47.82 74LS173_.3
  Bottom Layer w0.6: 74LS245.6 71.848,67.02 89.24,49.628 89.24,44.11 LED5.2 ; 74LS173_.3 112.385,68.844 112.385,76.781 113.99,78.386 113.99,82.525 117.772,86.307 119.454,86.307 SAIDA_B_REGISTER.4
LED6_1: LED6.1 R6.1 | length 24
  Bottom Layer w0.6: R6.1 90.247,50.767 90.247,48.183 LED6.1
LED6_2: 74LS173_.4 74LS245.7 LED6.2 SAIDA_B_REGISTER.3 | length 111.2
  Top Layer w0.6: LED6.2 100.766,46.41 106.227,46.41 74LS173_.4
  Bottom Layer w0.6: 74LS245.7 74.914,73.757 91.05,57.621 91.05,48.785 92.614,47.221 93.749,47.221 LED6.2 ; 74LS173_.4 128.026,68.209 132.575,68.209 133.368,69.002 133.368,80.881 SAIDA_B_REGISTER.3
LED7_1: LED7.1 R7.1 | length 45.6
  Top Layer w0.6: R7.1 63.148,51.615 v1(91.995,51.615)
  Bottom Layer w0.6: v1(91.995,51.615) 91.995,49.258 92.945,48.309 96.852,48.309 LED7.1
LED7_2: 74LS173_.5 74LS245.8 LED7.2 SAIDA_B_REGISTER.2 | length 107.3
  Top Layer w0.6: LED7.2 110.484,49.397 v1(113.645,49.397)
  Bottom Layer w0.6: 74LS245.8 91.95,58.736 91.95,54.607 101.069,45.488 102.213,45.488 LED7.2 ; v1(113.645,49.397) 124.333,60.085 74LS173_.5 129.028,66.671 132.204,66.671 134.218,68.684 134.218,82.571 SAIDA_B_REGISTER.2
LED8_1: LED8.1 R8.1 | length 33.7
  Top Layer w0.6: R8.1 82.65,50.008 88.773,43.885 88.773,42.733 89.517,41.99 107.776,41.99 LED8.1
LED8_2: 74LS173_.6 74LS245.9 LED8.2 SAIDA_B_REGISTER.1 | length 102.6
  Bottom Layer w0.6: 74LS245.9 89.374,63.851 92.772,63.851 96.595,60.029 96.595,59.613 103.602,52.606 105.763,52.606 111.633,46.736 ; LED8.2 111.633,46.736 ; SAIDA_B_REGISTER.1 130.048,87.879 135.021,82.907 135.021,68.352 131.747,65.078 129.975,65.078 74LS173_.6 126.873,61.484 112.125,46.736 111.633,46.736
R1_1: LED1.1 R1.1 | length 42.9
  Bottom Layer w0.6: LED1.1 57.023,42.703 58.835,40.891 81.811,40.891 83.713,42.793 83.713,51.586 R1.1
R2_1: LED2.1 R2.1 | length 32.5
  Bottom Layer w0.6: R2.1 58.293,63.142 58.293,42.661 59.05,41.903 63.239,41.903 LED2.1
R3_1: LED3.1 R3.1 | length 43.3
  Top Layer w0.6: v1(66.172,61.547) 72.728,68.102 78.5,68.102 R3.1
  Bottom Layer w0.6: v1(66.172,61.547) 65.913,61.288 65.913,42.66 66.67,41.903 70.859,41.903 LED3.1
R4_1: LED4.1 R4.1 | length 29.3
  Top Layer w0.6: R4.1 61.915,60.685 v1(68.997,60.685)
  Bottom Layer w0.6: v1(68.997,60.685) 68.997,54.193 LED4.1
S$31: 
S$33: 
S$35: 
U1_7: 74LS173.7 74LS173_.7 U4.1 | length 126
  Top Layer w0.6: U4.1 45.979,87.376 47.809,89.206 100.103,89.206 101.667,87.643 112.022,87.643 116.919,82.746 116.919,81.854 116.585,81.52 113.19,81.52 v1(112.979,81.731) ; v1(120.832,59.586) 127.023,59.586 74LS173_.7
  Bottom Layer w0.6: v1(112.979,81.731) 112.979,81.134 105.92,74.074 74LS173.7 105.676,67.933 114.024,59.586 v1(120.832,59.586)
U1_9: 74LS173.9 74LS173.10 74LS173_.9 74LS173_.10 U4.2 | length 96.5
  Top Layer w0.6: U4.2 47.997,88.256 98.77,88.256 105.332,81.694 74LS173.10 74LS173.9 109.193,80.717 118.292,80.717 74LS173_.10 74LS173_.9
U1_11: 74LS173.11 74LS245.15 U7.1 | length 84
  Top Layer w0.6: 74LS245.15 73.289,82.818 84.714,82.818 88.085,79.447 100.889,79.447 74LS173.11
  Bottom Layer w0.6: U7.1 44.577,57.155 44.927,57.155 54.395,66.623 54.395,81.056 57.87,84.53 68.695,84.53 74LS245.15
U1_12: 74LS173.12 74LS245.16 U7.2 | length 82.4
  Top Layer w0.6: 74LS245.16 71.553,83.622 85.447,83.622 88.818,80.25 99.152,80.25 74LS173.12
  Bottom Layer w0.6: U7.2 55.198,63.834 55.198,80.723 58.202,83.727 66.958,83.727 74LS245.16
U1_13: 74LS173.13 74LS245.17 U7.3 | length 80.6
  Top Layer w0.6: 74LS245.17 69.948,84.557 95.193,84.557 74LS173.13
  Bottom Layer w0.6: U7.3 56.607,62.703 56.607,80.997 58.399,82.789 65.356,82.789 74LS245.17
U1_14: 74LS173.14 74LS245.18 U7.4 | length 75.8
  Top Layer w0.6: v1(57.45,77.664) 60.515,77.664 74LS245.18
  Bottom Layer w0.6: U7.4 57.45,61.006 v1(57.45,77.664) ; 74LS245.18 65.685,79.921 93.743,79.921 74LS173.14
U1_15: 74LS173.15 74LS173_.15 U4.3 | length 91
  Top Layer w0.6: U4.3 49.65,87.369 v1(87.301,87.369) ; v1(103.711,84.457) 113.939,84.457 v1(116.068,82.327)
  Bottom Layer w0.6: v1(87.301,87.369) 74LS173.15 95.738,84.457 v1(103.711,84.457) ; v1(116.068,82.327) 116.713,81.683 74LS173_.15
U2_11: 74LS173_.11 74LS245.11 U6.1 | length 107.6
  Top Layer w0.6: 74LS245.11 84.766,78.62 117.849,78.62 74LS173_.11
  Bottom Layer w0.6: U6.1 44.577,67.696 44.24,67.696 43.23,68.705 43.23,77.866 43.502,78.138 46.937,78.138 56.541,87.742 75.644,87.742 74LS245.11
U2_12: 74LS173_.12 74LS245.12 U6.2 | length 102.9
  Top Layer w0.6: 74LS245.12 83.042,77.804 116.125,77.804 74LS173_.12
  Bottom Layer w0.6: U6.2 51.703,70.88 51.703,81.768 56.873,86.939 73.907,86.939 74LS245.12
U2_13: 74LS173_.13 74LS245.13 U6.3 | length 101.6
  Top Layer w0.6: 74LS245.13 81.305,77.001 114.388,77.001 74LS173_.13
  Bottom Layer w0.6: U6.3 52.506,69.143 52.506,81.436 57.205,86.136 72.17,86.136 74LS245.13
U2_14: 74LS173_.14 74LS245.14 U6.4 | length 117
  Top Layer w0.6: v1(53.567,70.637) 110.416,70.637 110.884,71.106 117.743,71.106 74LS173_.14
  Bottom Layer w0.6: U6.4 53.567,67.664 v1(53.567,70.637) 53.567,81.363 57.538,85.333 70.432,85.333 74LS245.14
U2_19: 74LS245.19 U4.4 | length 17.8
  Top Layer w0.6: U4.4 60.067,79.756 74LS245.19

## Silkscreen, mask and mechanical layers (free items; w line width, h text height)
Top Overlay:
  text "SINAIS IN" at 39.688,87.122 h1.14 r270
  text "B REGISTER" at 68.58,86.448 h4.14
  text "b_reg_b7" at 110.807,85.725 h1.14 r270
  text "b_reg_b6" at 113.474,85.725 h1.14 r270
  text "b_reg_b5" at 116.014,85.725 h1.14 r270
  text "b_reg_b4" at 118.3,85.725 h1.14 r270
  text "b_reg_b3" at 121.475,85.725 h1.14 r270
  text "b_reg_b2" at 124.142,85.725 h1.14 r270
  text "b_reg_b1" at 126.682,85.725 h1.14 r270
  text "b_reg_b0" at 128.969,85.725 h1.14 r270
  text "/BR_IN" at 47.752,83.629 h1.14
  text "RESERT" at 47.879,81.343 h1.14
  text "/BR_OUT" at 47.879,79.184 h1.14
  text "ALIMENTAO" at 39.814,77.47 h1.14 r270
  text "+5VCC" at 47.752,75.629 h1.14
  text "GND" at 47.879,70.168 h1.14
  text "GND LOOP" at 47.879,68.008 h1.14
  text "+5VCC LOOP" at 49.369,67.344 h1.14
  text "BUS0" at 47.879,65.087 h1.14
  text "BUS1" at 39.941,64.516 h1.14 r270
  text "BUS1" at 47.879,62.801 h1.14
  text "BUS2" at 47.879,60.261 h1.14
  text "BUS3" at 47.879,57.594 h1.14
  text "BUS4" at 47.879,54.546 h1.14
  text "BUS2" at 39.814,53.848 h1.14 r270
  text "BUS5" at 47.879,52.261 h1.14
  text "BUS6" at 47.879,49.721 h1.14
  text "BUS7" at 47.879,47.053 h1.14